# EAGLE board mbhp_dinx4_v2 (EAGLE 4.03)
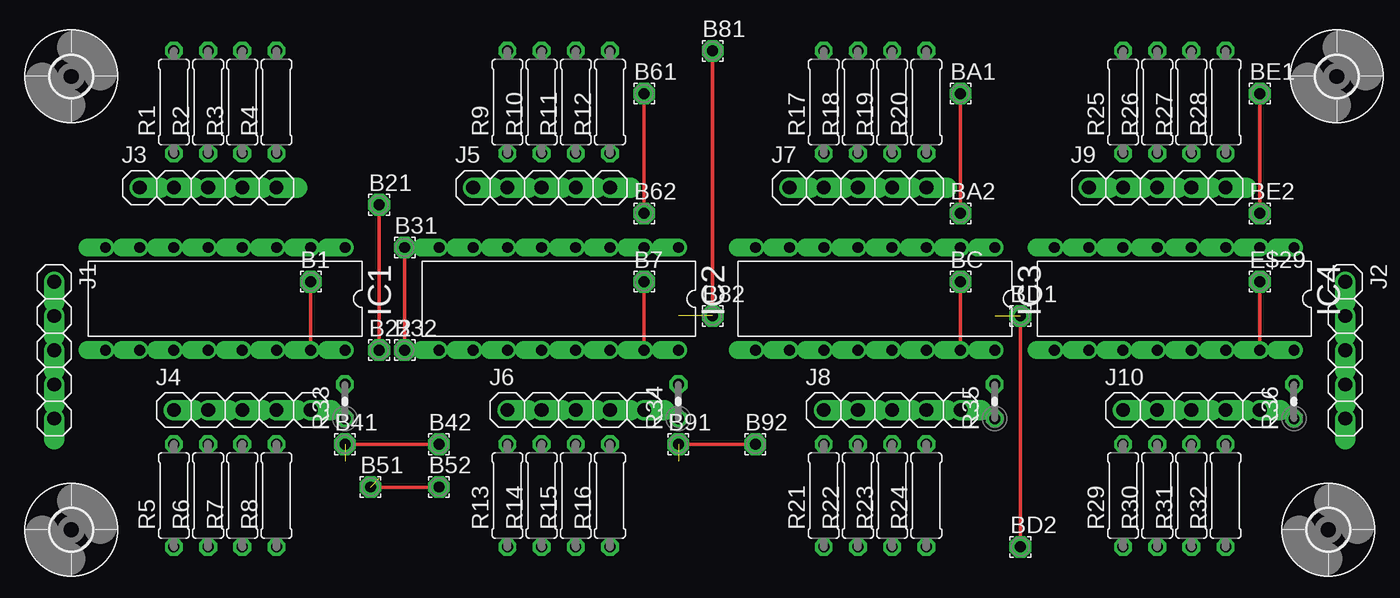
[diagram p0: board, top side]
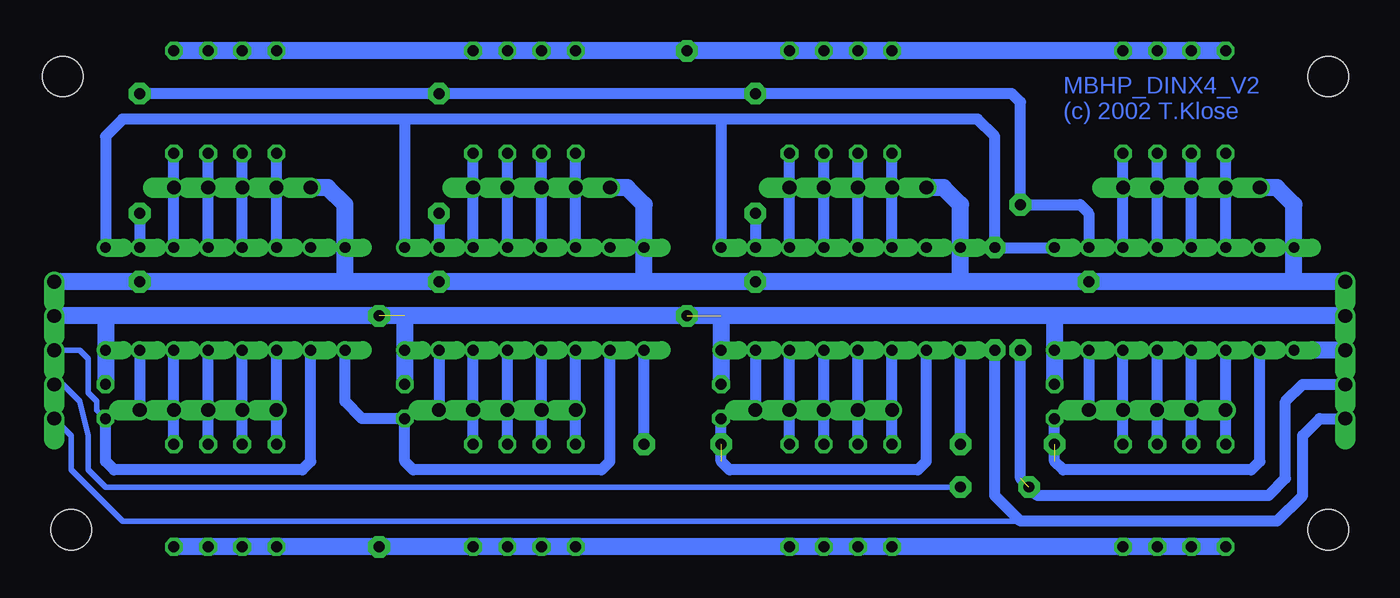
[diagram p1: board, bottom side, seen from below]

No outline drawn. Coordinates in mm, seen from the top.
Copper layers used: Top, Bottom

## Footprints (pad centres in the part's own frame; a part is rotated, then mirrored left to right if it is on the bottom)
1,6/0,8 = drill 0.813 pad 1.6 octagon: 1 0,0
3,0 = hole 3: 0,0
DIL16 = drill 0.813 offset: 1 -8.89,-3.81; 2 -6.35,-3.81; 3 -3.81,-3.81; 4 -1.27,-3.81; 5 1.27,-3.81; 6 3.81,-3.81; 7 6.35,-3.81; 8 8.89,-3.81; 9 8.89,3.81; 10 6.35,3.81; 11 3.81,3.81; 12 1.27,3.81; 13 -1.27,3.81; 14 -3.81,3.81; 15 -6.35,3.81; 16 -8.89,3.81
1X05 = drill 1.016 offset: 1 -5.08,0; 2 -2.54,0; 3 0,0; 4 2.54,0; 5 5.08,0
0207/7 = drill 0.813 octagon: 1 -3.81,0; 2 3.81,0
0204V = drill 0.813 octagon: 1 -1.27,0; 2 1.27,0

## Placement (x,y rotation side)
B1  [1,6/0,8]  20.95,21.59 0 top
B7  [1,6/0,8]  45.72,21.59 0 top
B21  [1,6/0,8]  26.04,27.3 0 top
B22  [1,6/0,8]  26.04,16.51 0 top
B31  [1,6/0,8]  27.94,24.13 0 top
B32  [1,6/0,8]  27.94,16.51 0 top
B41  [1,6/0,8]  23.5,9.53 0 top
B42  [1,6/0,8]  30.48,9.53 0 top
B51  [1,6/0,8]  25.4,6.35 0 top
B52  [1,6/0,8]  30.48,6.35 0 top
B61  [1,6/0,8]  45.72,35.56 0 top
B62  [1,6/0,8]  45.72,26.67 0 top
B81  [1,6/0,8]  50.8,38.73 0 top
B82  [1,6/0,8]  50.8,19.05 0 top
B91  [1,6/0,8]  48.26,9.53 0 top
B92  [1,6/0,8]  53.98,9.53 0 top
BA1  [1,6/0,8]  69.22,35.56 0 top
BA2  [1,6/0,8]  69.22,26.67 0 top
BC  [1,6/0,8]  69.22,21.59 0 top
BD1  [1,6/0,8]  73.66,19.05 0 top
BD2  [1,6/0,8]  73.66,1.91 0 top
BE1  [1,6/0,8]  91.44,35.56 0 top
BE2  [1,6/0,8]  91.44,26.67 0 top
E$14  [3,0]  3.17,36.83 0 top
E$15  [3,0]  97.16,36.83 0 top
E$20  [3,0]  3.17,3.17 0 top
E$29  [1,6/0,8]  91.44,21.59 0 top
E$30  [3,0]  96.52,3.17 0 top
IC1  74HC165  [DIL16]  14.61,20.32 180 top
IC2  74HC165  [DIL16]  39.37,20.32 180 top
IC3  74HC165  [DIL16]  62.87,20.32 180 top
IC4  74HC165  [DIL16]  85.09,20.32 180 top
J1  [1X05]  1.91,16.51 270 top
J2  [1X05]  97.79,16.51 270 top
J3  [1X05]  13.34,28.57 0 top
J4  [1X05]  15.88,12.06 0 top
J5  [1X05]  38.1,28.57 0 top
J6  [1X05]  40.64,12.06 0 top
J7  [1X05]  61.59,28.57 0 top
J8  [1X05]  64.14,12.06 0 top
J9  [1X05]  83.82,28.57 0 top
J10  [1X05]  86.36,12.06 0 top
R1  10k  [0207/7]  10.79,34.92 90 top
R2  10k  [0207/7]  13.34,34.92 90 top
R3  10k  [0207/7]  15.88,34.92 90 top
R4  10k  [0207/7]  18.41,34.92 90 top
R5  10k  [0207/7]  10.79,5.71 90 top
R6  10k  [0207/7]  13.34,5.71 90 top
R7  10k  [0207/7]  15.88,5.71 90 top
R8  10k  [0207/7]  18.41,5.71 90 top
R9  10k  [0207/7]  35.56,34.92 90 top
R10  10k  [0207/7]  38.1,34.92 90 top
R11  10k  [0207/7]  40.64,34.92 90 top
R12  10k  [0207/7]  43.18,34.92 90 top
R13  10k  [0207/7]  35.56,5.71 90 top
R14  10k  [0207/7]  38.1,5.71 90 top
R15  10k  [0207/7]  40.64,5.71 90 top
R16  10k  [0207/7]  43.18,5.71 90 top
R17  10k  [0207/7]  59.05,34.92 90 top
R18  10k  [0207/7]  61.59,34.92 90 top
R19  10k  [0207/7]  64.14,34.92 90 top
R20  10k  [0207/7]  66.67,34.92 90 top
R21  10k  [0207/7]  59.05,5.71 90 top
R22  10k  [0207/7]  61.59,5.71 90 top
R23  10k  [0207/7]  64.14,5.71 90 top
R24  10k  [0207/7]  66.67,5.71 90 top
R25  10k  [0207/7]  81.28,34.92 90 top
R26  10k  [0207/7]  83.82,34.92 90 top
R27  10k  [0207/7]  86.36,34.92 90 top
R28  10k  [0207/7]  88.9,34.92 90 top
R29  10k  [0207/7]  81.28,5.71 90 top
R30  10k  [0207/7]  83.82,5.71 90 top
R31  10k  [0207/7]  86.36,5.71 90 top
R32  10k  [0207/7]  88.9,5.71 90 top
R33  10k  [0204V]  23.5,12.7 90 top
R34  10k  [0204V]  48.26,12.7 90 top
R35  10k  [0204V]  71.75,12.7 90 top
R36  10k  [0204V]  93.98,12.7 90 top

## Library data of the parts
B1 B7 B21 B22 B31 B32 B41 B42 B51 B52 B61 B62 B81 B82 B91 B92 BA1 BA2 BC BD1 BD2 BE1 BE2 E$29 = wirepad
E$14 E$15 E$20 E$30 = holes
IC1-IC4 = 74xx-us
J1-J10 = pinhead
R1-R36 = rcl

## Nets
B22: B21.1 B22.1 B51.1 B52.1 B61.1 B62.1 BA1.1 BA2.1 BE1.1 BE2.1 IC1.2 IC2.2 IC3.2 IC4.2 J1.4 J2.4
S$1: IC1.6 J3.2 R1.1
S$2: IC1.5 J3.3 R2.1
S$3: IC1.4 J3.4 R3.1
S$4: IC1.3 J3.5 R4.1
S$5: IC1.11 J4.1 R5.2
S$6: IC1.12 J4.2 R6.2
S$7: IC1.13 J4.3 R7.2
S$8: IC1.14 J4.4 R8.2
S$9: B91.1 B92.1 IC2.10 IC3.9 R34.1
S$10: IC1.9 J1.3
S$11: B31.1 B32.1 IC1.1 IC2.1 IC3.1 IC4.1 J1.5 J2.5
S$13: B41.1 B42.1 IC1.10 IC2.9 R33.1
S$16: IC2.6 J5.2 R9.1
S$17: IC2.5 J5.3 R10.1
S$18: IC2.4 J5.4 R11.1
S$19: IC2.3 J5.5 R12.1
S$20: IC2.11 J6.1 R13.2
S$21: IC2.12 J6.2 R14.2
S$22: IC2.13 J6.3 R15.2
S$23: IC2.14 J6.4 R16.2
S$24: IC3.6 J7.2 R17.1
S$25: IC3.5 J7.3 R18.1
S$26: IC3.4 J7.4 R19.1
S$27: IC3.3 J7.5 R20.1
S$28: IC3.11 J8.1 R21.2
S$29: IC3.12 J8.2 R22.2
S$30: IC3.13 J8.3 R23.2
S$31: IC3.14 J8.4 R24.2
S$32: IC4.11 J10.1 R29.2
S$33: IC4.12 J10.2 R30.2
S$34: IC4.13 J10.3 R31.2
S$35: IC4.14 J10.4 R32.2
S$36: IC4.6 J9.2 R25.1
S$37: IC4.5 J9.3 R26.1
S$38: IC4.4 J9.4 R27.1
S$39: IC4.3 J9.5 R28.1
S$40: IC3.10 IC4.9 R35.1
S$41: IC4.10 J2.3 R36.1
VDD: B81.1 B82.1 BD1.1 BD2.1 IC1.16 IC2.16 IC3.16 IC4.16 J1.2 J2.2 R1.2 R2.2 R3.2 R4.2 R5.1 R6.1 R7.1 R8.1 R9.2 R10.2 R11.2 R12.2 R13.1 R14.1 R15.1 R16.1 R17.2 R18.2 R19.2 R20.2 R21.1 R22.1 R23.1 R24.1 R25.2 R26.2 R27.2 R28.2 R29.1 R30.1 R31.1 R32.1 R33.2 R34.2 R35.2 R36.2
VSS: B1.1 B7.1 BC.1 E$29.1 IC1.8 IC1.15 IC2.8 IC2.15 IC3.8 IC3.15 IC4.8 IC4.15 J1.1 J2.1 J3.1 J4.5 J5.1 J6.5 J7.1 J8.5 J9.1 J10.5

## Tracks (layer width: path | path; a pad name or v marks a point on that pad's centre or on a via)
B22  (via drill 0.61)  (1 unrouted)
  Top 0.254: B22.1 B21.1 | B51.1 B52.1 | B61.1 B62.1 | BA1.1 BA2.1 | BE1.1 BE2.1
  Bottom 0.406: J2.4 97.16,13.97 95.89,12.7 95.25,10.16 95.25,7.62 93.98,6.35 B52.1
  Bottom 0.813: BE1.1 BA1.1 B61.1 26.67,35.56 26.04,34.92 B21.1 21.59,27.3 20.95,26.67 IC1.2 | B22.1 26.04,6.99 24.77,5.71 7.62,5.71 6.35,6.99 6.35,12.7 5.08,13.97 J1.4 | B62.1 IC2.2 | BA2.1 IC3.2 | BE2.1 IC4.2
  other vias: 26.04,27.3 26.04,16.51 45.72,26.67 69.22,26.67 91.44,26.67
S$1
  Bottom 0.813: IC1.6 J3.2 R1.1
S$2
  Bottom 0.813: IC1.5 J3.3 R2.1
S$3
  Bottom 0.813: IC1.4 J3.4 R3.1
S$4
  Bottom 0.813: IC1.3 J3.5 R4.1
S$5
  Bottom 0.813: IC1.11 J4.1 R5.2
S$6
  Bottom 0.813: IC1.12 J4.2 R6.2
S$7
  Bottom 0.813: IC1.13 J4.3 R7.2
S$8
  Bottom 0.813: IC1.14 J4.4 R8.2
S$9  (1 unrouted)
  Top 0.254: B91.1 B92.1
  Bottom 0.813: B92.1 IC3.9 | IC2.10 33.02,8.26 33.66,7.62 47.62,7.62 48.26,8.26 R34.1
S$10
  Bottom 1.27: J1.3 IC1.9
S$11  (via drill 0.61)
  Top 0.254: B32.1 B31.1
  Bottom 0.406: J2.5 96.52,10.16 96.52,7.62 92.71,3.81 26.04,3.81
  Bottom 0.813: IC4.1 93.98,32.38 92.71,33.66 71.75,33.66 | 71.75,33.66 IC3.1 | 48.26,33.66 IC2.1 | 48.26,33.66 71.75,33.66 | 48.26,33.66 29.21,33.66 27.94,32.38 B31.1 IC1.1 | J1.5 3.81,11.43 5.08,10.16 5.08,5.71 6.99,3.81 26.04,3.81 27.94,5.71 B32.1
  other vias: 27.94,16.51
S$13  (1 unrouted)
  Top 0.254: B41.1 B42.1
  Bottom 0.813: IC1.10 8.26,8.26 8.89,7.62 22.86,7.62 23.5,8.26 R33.1 | B42.1 IC2.9
S$16
  Bottom 0.813: R9.1 J5.2 IC2.6
S$17
  Bottom 0.813: R10.1 J5.3 IC2.5
S$18
  Bottom 0.813: R11.1 J5.4 IC2.4
S$19
  Bottom 0.813: R12.1 J5.5 IC2.3
S$20
  Bottom 0.813: R13.2 J6.1 IC2.11
S$21
  Bottom 0.813: R14.2 J6.2 IC2.12
S$22
  Bottom 0.813: R15.2 J6.3 IC2.13
S$23
  Bottom 0.813: R16.2 J6.4 IC2.14
S$24
  Bottom 0.813: R17.1 J7.2 IC3.6
S$25
  Bottom 0.813: R18.1 J7.3 IC3.5
S$26
  Bottom 0.813: R19.1 J7.4 IC3.4
S$27
  Bottom 0.813: R20.1 J7.5 IC3.3
S$28
  Bottom 0.813: R21.2 J8.1 IC3.11
S$29
  Bottom 0.813: R22.2 J8.2 IC3.12
S$30
  Bottom 0.813: R23.2 J8.3 IC3.13
S$31
  Bottom 0.813: R24.2 J8.4 IC3.14
S$32
  Bottom 0.813: R29.2 J10.1 IC4.11
S$33
  Bottom 0.813: R30.2 J10.2 IC4.12
S$34
  Bottom 0.813: R31.2 J10.3 IC4.13
S$35
  Bottom 0.813: R32.2 J10.4 IC4.14
S$36
  Bottom 0.813: R25.1 J9.2 IC4.6
S$37
  Bottom 0.813: R26.1 J9.3 IC4.5
S$38
  Bottom 0.813: R27.1 J9.4 IC4.4
S$39
  Bottom 0.813: R28.1 J9.5 IC4.3
S$40
  Bottom 0.813: IC3.10 56.52,8.26 57.15,7.62 71.12,7.62 71.75,8.26 R35.1 74.93,11.43 76.2,12.7 IC4.9
S$41
  Bottom 0.406: J2.3 95.89,16.51 95.25,15.88 95.25,13.34 94.61,12.7 94.61,12.06 R36.1
  Bottom 0.813: R36.1 93.98,8.26 93.34,7.62 79.38,7.62 78.74,8.26 IC4.10
VDD  (2 unrouted)
  Top 0.254: BD2.1 BD1.1 | B81.1 B82.1
  Bottom 0.406: R12.2 B81.1 | R24.1 BD2.1
  Bottom 1.27: R36.2 IC4.16 93.98,19.05 | R35.2 IC3.16 71.75,19.05 | 93.98,19.05 J2.2 | 71.75,19.05 93.98,19.05 | R34.2 IC2.16 48.26,19.05 | 48.26,19.05 71.75,19.05 | R33.2 IC1.16 23.5,19.05 | 23.5,19.05 48.26,19.05 | J1.2 23.5,19.05 | R28.2 R27.2 R26.2 R25.2 R20.2 R19.2 R18.2 R17.2 B81.1 R12.2 R11.2 R10.2 R9.2 R4.2 R3.2 R2.2 R1.2 | R32.1 R31.1 R30.1 R29.1 BD2.1 R24.1 R23.1 R22.1 R21.1 R16.1 R15.1 R14.1 R13.1 R8.1 R7.1 R6.1 R5.1
VSS
  Top 0.254: E$29.1 IC4.15 | BC.1 IC3.15 | B7.1 IC2.15 | B1.1 IC1.15
  Bottom 0.813: IC4.15 J10.5 | IC3.15 J8.5 | IC2.15 J6.5 | IC1.15 J4.5
  Bottom 1.27: J9.1 77.47,28.57 76.2,27.3 IC4.8 76.2,21.59 | J7.1 55.24,28.57 53.98,27.3 IC3.8 53.98,21.59 | 76.2,21.59 E$29.1 J2.1 | J5.1 31.75,28.57 30.48,27.3 IC2.8 30.48,21.59 | 76.2,21.59 BC.1 53.98,21.59 | 53.98,21.59 B7.1 30.48,21.59 | J3.1 6.99,28.57 5.71,27.3 IC1.8 5.71,21.59 | 30.48,21.59 B1.1 5.71,21.59 | J1.1 5.71,21.59

## Text on the board
Bottom: MBHP_DINX4_V2 | (c) 2002 T.Klose